# Altium PCB PCB1.PcbDoc
Units mil, origin at the board's own origin, x right, y up, seen from the top; angles counter-clockwise.
Board outline 970 x 870 mil, 2 copper layers (Top Layer, Bottom Layer); 11 components, 8 nets, 40 pads, 7 vias.
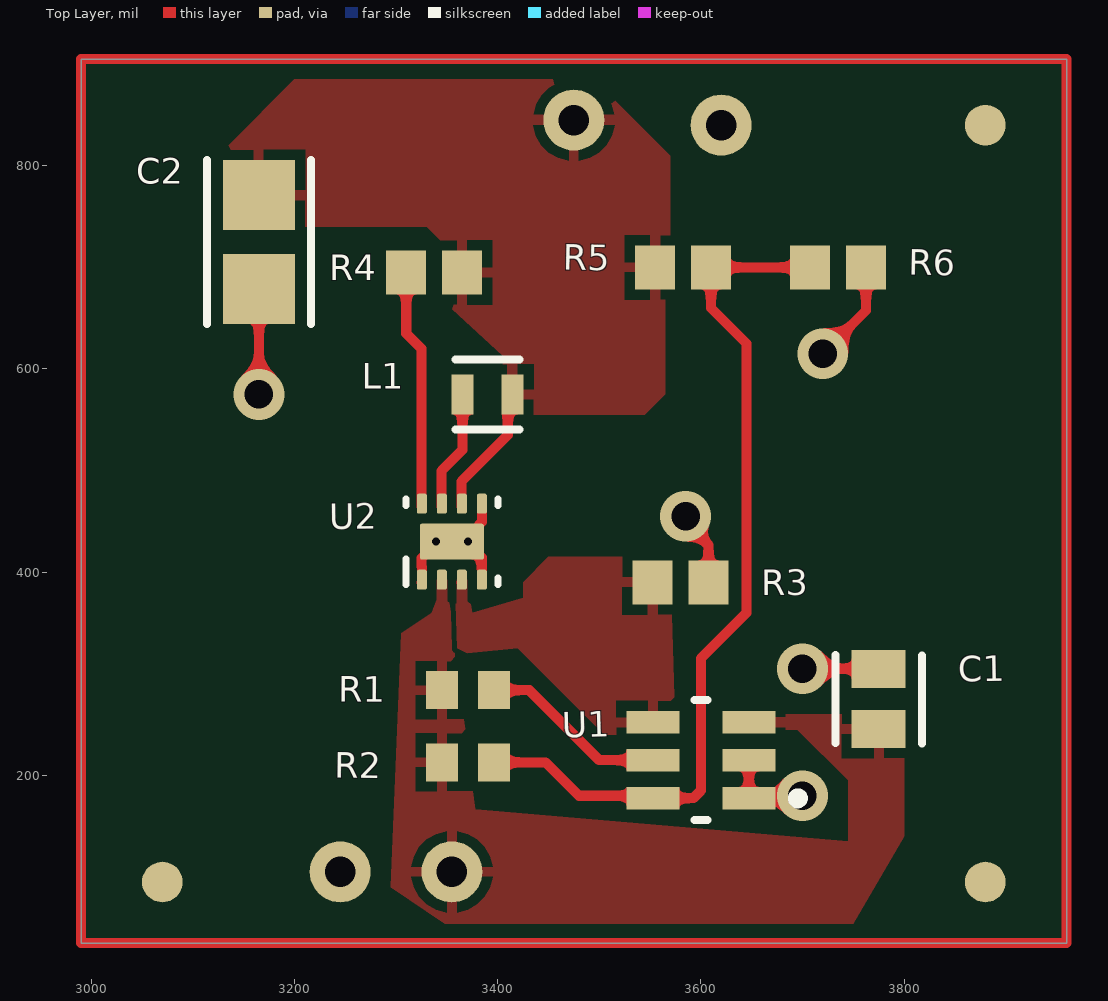
[diagram p0: Top Layer view]
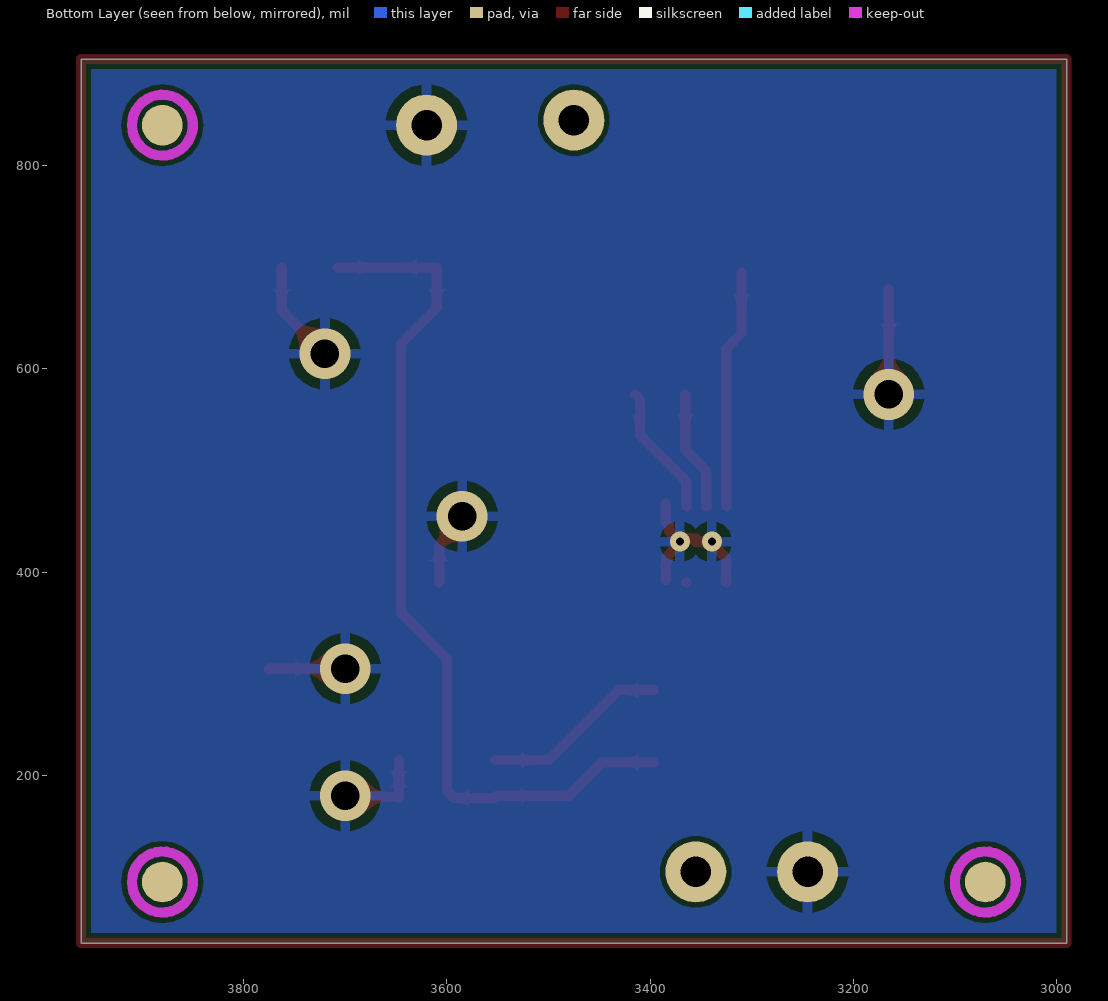
[diagram p1: Bottom Layer view, seen from below]
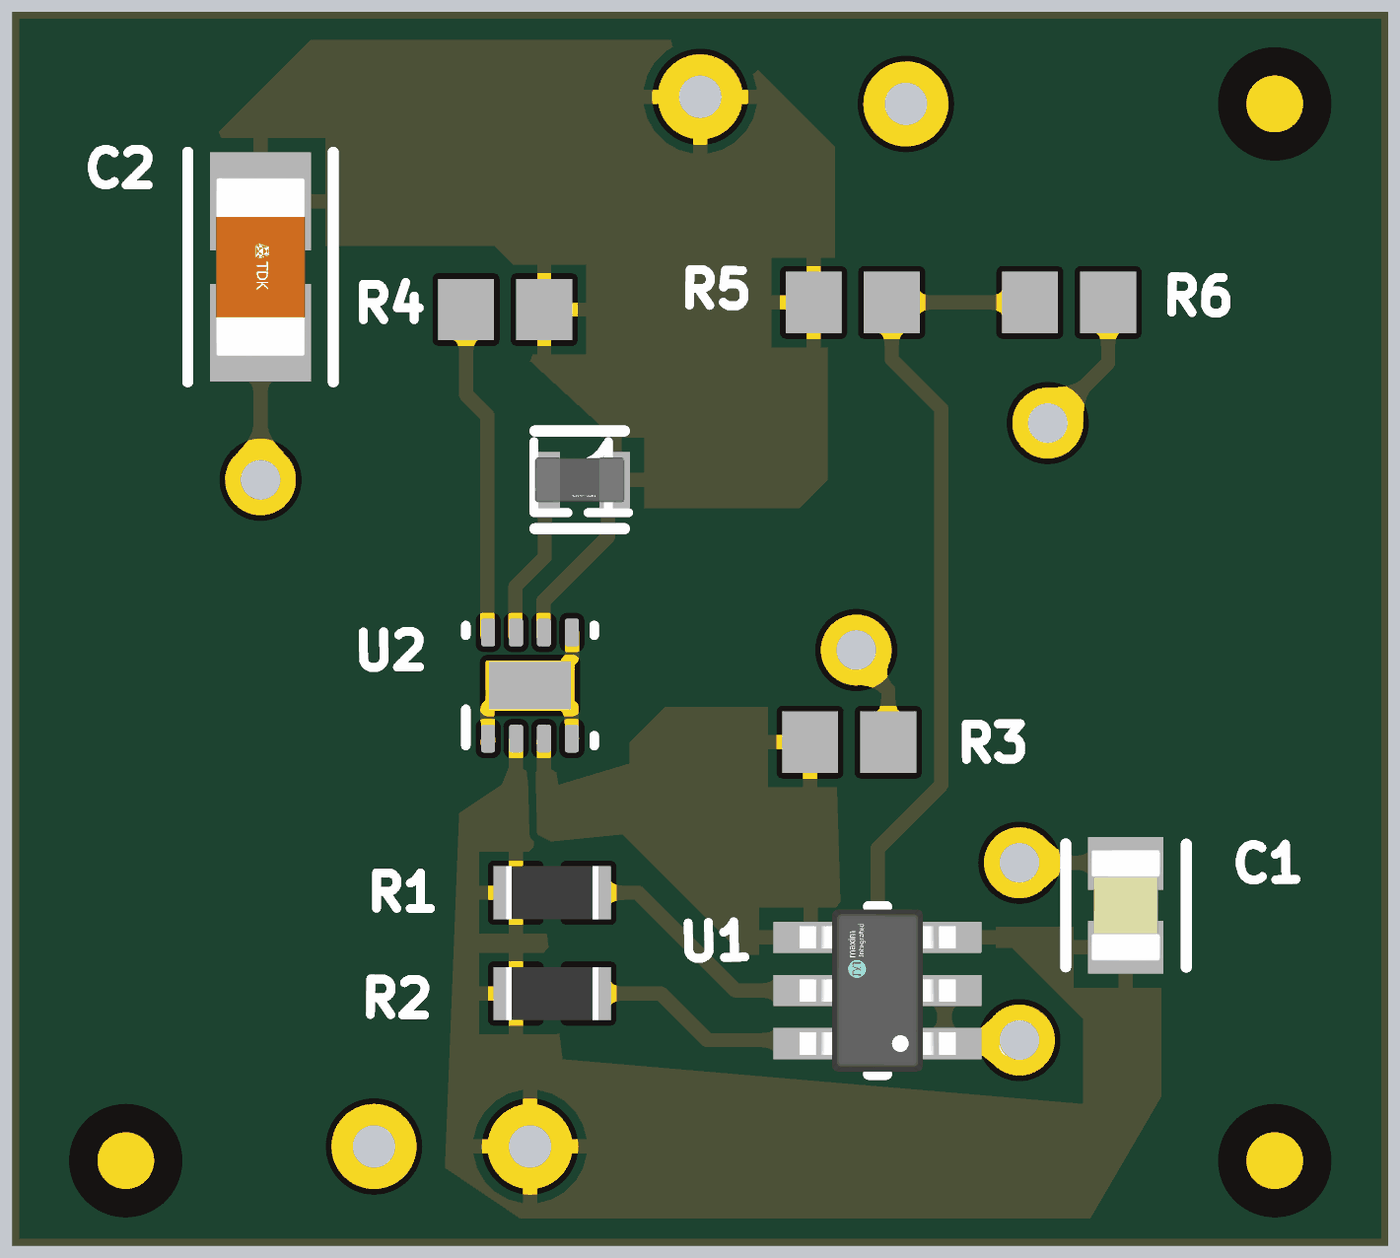
[diagram p2: 3D render of the assembled board from above, using the file's embedded part models]

## Layer stack, top to bottom
Top Solder: solder mask 0.4, Solder Resist, Dk 3.5
Top Layer: signal copper 1.4
Dielectric 1: dielectric 12.6, FR-4, Dk 4.8
Bottom Layer: signal copper 1.4
Bottom Solder: solder mask 0.4, Solder Resist, Dk 3.5

## Board outline
2990,35 2990,905 3960,905 3960,35

## Design rules (kind name [scope] priority, off if disabled: settings)
BoardOutlineClearance [All] p1: gap=10 ignorepadtopadclearanceinfootprint=FALSE except(0: Arc-SplitContinuation Track-SplitContinuation SMDPad-SplitContinuation THPad-SplitContinuation Via-SplitContinuation Fill-SplitContinuation Poly-SplitContinuation Region-SplitContinuation Text-SplitContinuation)
Clearance [All] p1: gap=5 ignorepadtopadclearanceinfootprint=FALSE except(0: Arc-Hole Track-Hole SMDPad-Hole THPad-Hole Via-Hole Fill-Hole Poly-Hole Region-Hole Text-Hole)
PolygonConnect [All] p1: connectstyle=Relief reliefconductorwidth=10 reliefentries=4 polygonreliefangle="90 Angle" airgapwidth=10
RoutingVias [All] p1: holewidth=28 width=50 viastyle="Through Hole" minholewidth=5 minwidth=5 maxholewidth=28 maxwidth=50
SolderMaskExpansion [All] p1: expansion=4 istentingtop=FALSE
Width [All] p1: maxlimit=10 minlimit=10 preferedwidth=10
30 further rules are at their usual default settings.

## Components (designator, comment, footprint, x,y, rotation, side; value= is the part's Value field where it differs from the comment)
C1 "C0805C106K8PACTU" FP-C0805C-DG-MFG 3775,275 r90 top value=10uF
C2 "C3216X5R1V226M160AC" FP-C3216-160-0_2-IPC_B 3165,725 r270 top
L1 "CBMF1608T2R2M" FP-CBMF1608-MFG 3390,575 r0 top
R1 "CRCW060310K0FKEA" RESC1609X50X30NL8T20 3370.59,283.88 r180 top
R2 "CRCW060310K0FKEA" RESC1609X50X30NL8T20 3370.59,212.84 r180 top
R3 "ERA3AEB104V" RESC1608X55X30ML20T20 3580,390 r180 top
R4 "ERA3AEB104V" RESC1608X55X30ML20T20 3337.44,695 r0 top
R5 "ERA3AEB104V" RESC1608X55X30ML20T20 3582.44,700 r180 top
R6 "ERA3AEB104V" RESC1608X55X30ML20T20 3735,700 r180 top
U1 "MAX16150AUT+T" FP-U6-1-MFG 3600,215 r180 top
U2 "TPS62162DSGR" DSG0008A_V 3355,430 r90 top

## Footprints (in the part's own frame and the unit in brackets; to place one, negate y for a bottom-side part, rotate by r counter-clockwise, add the part's x,y. Pads: shape width x height; smd on the part's side, far side on the other; paste and mask are expansions set on the pad)
DSG0008A_V [mm] "SON, 8-Leads, Body 2x2mm, Pitch 0.5mm, Thermal Pad 1.6x0.9mm, TI Recommended"
  rrect40% 0.5x0.25 smd: 1(-0.95,0.75) 2(-0.95,0.25) 3(-0.95,-0.25) 4(-0.95,-0.75) 5(0.95,-0.75) 6(0.95,-0.25) 7(0.95,0.25) 8(0.95,0.75)
  rrect11% 0.9x1.6 smd paste-0.45: 9(0,0)
  silkscreen extent -1.07,-1.15 1.07,1.15, body extent -1.05,-1.05 1.05,1.05, height 0.8
FP-C0805C-DG-MFG [mm]
  rect 0.95x1.35 smd paste+0 mask+0: 1(-0.75,0) 2(0.75,0)
  silkscreen extent -1.11,-1.08 1.1,1.07, body extent -1.4,-0.85 1.4,0.85, height 0.25
FP-C3216-160-0_2-IPC_B [mil]
  rect 69.05x71.11 smd paste+0 mask+0: 1(-46.3,0) 2(46.3,0)
  silkscreen extent -81,-51 81,51, body extent -91,-45 91,45, height 10
FP-CBMF1608-MFG [mm]
  rect 0.55x1 smd paste+0 mask+0: 1(-0.625,0) 2(0.625,0)
  silkscreen extent -0.8,-0.87 0.8,0.87, body extent -1,-0.6 1,0.6, height 0.25
FP-U6-1-MFG [mm]
  rect 1.33x0.56 smd paste+0 mask+0: 1(-1.2,0.95) 2(-1.2,0) 3(-1.2,-0.95) 4(1.2,-0.95) 5(1.2,0) 6(1.2,0.95)
  silkscreen extent -2.55,-1.5 0.16,1.5, body extent -1.96,-1.73 1.96,1.73, height 0.25
RESC1608X55X30ML20T20 [mm] "Chip Resistor, 2-Leads, Body 1.60x0.80mm, IPC Low Density"
  rect 1x1.1 smd: 1(-0.7,0) 2(0.7,0)
  body extent -0.9,-0.5 0.9,0.5, height 0.55
RESC1609X50X30NL8T20 [mm] "Chip Resistor, 2-Leads, Body 1.65x0.95mm, IPC Medium Density"
  rect 0.8x0.95 smd: 1(-0.65,0) 2(0.65,0)
  body extent -0.82,-0.48 0.82,0.48, height 0.5

## Part data
C1: library part CMP-2007-03243-2, "CAP CER 10UF 10V X5R 0805", 3DS Part Number=220-00001, Capacitance=10uF, Manufacturer=Kemet, Package=C0805C-DG, Temperature="-55°C to +85°C", Temperature Characteristic=X5R, Temperature Coefficient=15%, Temperature Range High=+85°C, Temperature Range Low=-55°C, Tolerance=10%, Voltage=10V, Automotive=No, Category=Cap, ComponentLink2Description=Datasheet, ComponentLink2URL=https://content.kemet.com/datasheets/KEM_C1006_X5R_SMD.pdf, Device Class L1="Passive Components", Device Class L2=Capacitors, Device Class L3="Ceramic Capacitors", Digikey Description="CAP CER 10UF 10V X5R 0805", Height=1.4mm, Ipc Land Pattern Name=CAPC200125X125, Lead Free=Yes, Manufacturer Part Number=C0805C106K8PACTU, Material=Ceramic, Mouser Description="CAP CER 10UF 10V X5R 0805", Octopart=https://octopart.com/c0805c106k8pactu-kemet-98697, RoHS=TRUE, Voltage Rating=10V
C2: library part CMP-2000-05398-2, "Multilayer Ceramic Capacitors 22uF ±20% 35V X5R SMD 1206", Capacitance=22uF, Case Code (Imperial)=1206, Case Code (Metric)=3216, Dielectric=X5R, Dielectric Material=Ceramic, Max Operating Temperature=85°C, Min Operating Temperature=-55°C, Package Quantity=2000, Tolerance=20%, Voltage=35V, Case/Package=1206, Construction=Flat, Depth=1.6mm, Height=1.6mm, Lead Free="Lead Free", Length=3.2mm, Mount="Surface Mount", Packaging="Tape and Reel", Radiation Hardening=No, REACH SVHC="No SVHC", Resistor Type=Ceramic, RoHS Compliant=Yes, Series=C, Termination=SMD/SMT, Thickness=1.6mm, Voltage Rating=35V, Voltage Rating (DC)=35V, Weight=0.000571oz, Width=0.063inch
L1: library part CMP-14484-000379-1, "SMD Inductors 2.2uH ±20% 0.56A 0.221Ω 0603", Case Code (Imperial)=0603, Case Code (Metric)=1608, Current Rating=560mA, DC Resistance (DCR)=221mR, Inductance=2.2uH, Inductance Tolerance=20%, Max Operating Temperature=105°C, Min Operating Temperature=-40°C, Package Quantity=1, Resistor Type=Wirewound, Saturation Current=190mA, Self Resonant Frequency=80MHz, Test Frequency=7.96MHz, Case/Package=0603, Core Material=Ferrite, DC Current=560mA, Depth=1mm, Halogen Free="Halogen Free", Height=0.8mm, Height - Seated (Max)=0.039inch, Lead Free="Lead Free", Length=1.6mm, Max DC Current=560mA, Military Standard=Not, Mount="Surface Mount", Packaging="Tape and Reel", Radiation Hardening=No, RoHS Compliant=Yes, Series=CBMF, Shielding=Unshielded, Termination=SMD/SMT, Tolerance=20%, Width=0.8mm
R1 R2: library part CMP-1666-00005-4, "Chip Resistor, 10 KOhm, +/- 1%, 100 mW, -55 to 155 degC, 0603 (1608 Metric), RoHS, Tape and Reel", Manufacturer="Vishay Semiconductor", Max Operating Temperature="155 degC", Min Operating Temperature="-55 degC", Package Quantity=5000, Voltage Rating="75 V", ComponentLink1Description="Manufacturer URL", ComponentLink1URL=http://www.vishay.com/, ComponentLink2Description=Datasheet, ComponentLink2URL=https://datasheet.ciiva.com/11809/0900766b80d98afc-11809037.pdf, DatasheetVersion=06/2012, Height="0.45 mm", Length="1.55 mm", Mounting Technology="Surface Mount", PackageDescription="2-Pin Surface Mount Device, Body 1.575 x 0.85 mm", PackageReference=0603, Packaging="Tape and Reel", REACH SVHC=Unknown, RoHSCompliant=true
R3 R4 R5 R6: library part CMP-2000-00875-1, Manufacturer=Panasonic, Part Number=ERA3AEB104V
U1: library part CMP-05723-001129-1, "IC SUPERVISOR 1 CHANNEL SOT23-6"
U2: library part CMP-0323-00316-3, "Buck Step Down Regulator with 3 to 17 V Input and 3.3 V Output, -40 to 85 degC, 8-Pin WSON (DSG), Green (RoHS & no Sb/Br)", Manufacturer="Texas Instruments", Rating=Catalog, Switch Current Limit(Typ)(A)=1.8, Code_JEDEC=MO-229, ComponentLink1Description=Datasheet, ComponentLink1URL=http://www.ti.com/general/docs/lit/getliterature.tsp?genericPartNumber=TPS62162&fileType=pdf, ComponentLink2Description="Package Specification", ComponentLink2URL=http://www.ti.com/litv/pdf/mpds308a, ComponentLink3Description="URL Link1", ComponentLink3URL="Samples URL:http://www.ti.com/product/tps62162#samples", DatasheetVersion=SLVSAM2A, Duty Cycle(Max)(%)=100, Eco-Plan="Green (RoHS & no Sb/Br)", Iout(Max)(A)=1, Iq(Typ)(mA)=0.017, Mounting Technology="Surface Mount", PackageDescription="8-Pin Plastic Small Outline No-Lead, 2 x 2 x 0.8 mm Body, 0.5 mm Pitch, Exposed Pad", PackageReference=DSG0008A, PackageVersion="revB, Oct-2010", PartNumber=TPS62162DSGR, Preset Vout(V)=3.3, Regulated Outputs(#)=1, SubFamily="Step-Down Regulator", Synchronous Rectification=TRUE, Topology=Buck, Vin(Max)(V)=17, Vin(Min)(V)=3, Vout(Max)(V)=3.3, Vout(Min)(V)=3.3

## Free pads (board coordinates)
  round 40 all layers, no hole mask+20: 0(3070,95) 0(3880,95) 0(3880,840)
  round 60 hole 30: 3(3475,845) 4(3620,840) 5(3355,105) 6(3245,105)

## Via types
v1: diameter 50, hole 28, Top Layer to Bottom Layer, 5 vias
v2: diameter 19.68, hole 7.87, Top Layer to Bottom Layer, 2 vias

## Nets (pads, with @x,y where several pads share a name; then routed paths per layer and width w, separated by ;. In a path a pad name is that pad's centre, name@x,y a point inside that pad or via, vN(x,y) a via of type N, cw(c..) or ccw(c..) an arc to the next point about the centre after c; other vN are vias at no path point)
+3V3_Dig: C2.1 L1.2 pad.3 R4.2 R5.2 U2.6 | length 131
  Top Layer w10: U2.6@3364.37,464.8 3364.37,489.37 3410,535 3410,570.39 L1.2
+3V3_EN: R3.2 U1.4 U2.3 | length 0.1
  Top Layer w10: U2.3@3364.29,389.92 U2.3@3364.37,390
GND: C1.2 C2.2 pad.4 pad.6 R3.1 R6.1 U1.1 U1.2 U2.1 U2.4 U2.5 U2.9 | length 610.9
  Top Layer w10: v1(3165,575) C2.2 ; U2.1@3325,390 3325.47,390.47 U2.1 3325.39,392.68 3325.39,405.1 3325,405.5 3325,413.78 3339.25,428.03 v2(3339.25,430) U2.9 ; U2.9@3354.55,432.87 U2.9@3369.92,435.28 ; U2.4 3384.45,392.68 3384.45,414.33 3370.75,428.03 v2(3370.75,430) 3381.5,440.75 3381.5,446.5 3384.61,449.61 3384.61,467.32 U2.5 ; v1(3585,455) 3585,449.21 3607.56,426.65 R3.1 ; U1.2 U1.1 3648.44,178.8 3698.8,178.8 v1(3700,180) ; v1(3700,305) 3774.53,305 C1.2 ; v1(3720,615) 3762.56,657.56 R6.1
NetL1_1: L1.1 U2.7 | length 118.8
  Top Layer w10: U2.7@3344.69,464.8 3344.69,499.68 3365.39,520.39 L1.1
NetR1_1: R1.1 U1.5 | length 185.1
  Top Layer w10: R1.1 3431.12,283.88 3500,215 U1.5
NetR4_1: R4.1 U2.8 | length 236.5
  Top Layer w10: R4.1 3310,694.88 3310,635 3325,620 U2.8@3325,464.8
V_IN: C1.1 pad.5 R1.2 R2.2 U1.3 U2.2
Vmon1: R2.1 R5.1 R6.2 U1.6 | length 867.1
  Top Layer w10: R2.1 3447.16,212.84 3480,180 3550.35,180 U1.6 3592.6,177.6 3600,185 3600,315 3645,360 3645,625 3610,660 R5.1 R6.2
copper on no net: | length 3680
  Top Layer w10: 2990,35 3960,35 3960,905 2990,905 2990,35

## Polygon pours and split planes (outlines as drawn)
+3V3_EN on Top Layer "`" (solid, pour order 5): 3575,240 3569.7,415 3450,415 3425,390 3425,375 3375,360 3370.1,390 3358.37,390 3360,325 3370,320 3420,325 3505,240
V_IN on Top Layer "`" (solid, pour order 7): 3625,245 3695,245 3745,195 3745,135 3377.94,166.46 3349.33,395.47 3335,360 3305,340 3295,90 3348.11,54.2 3750,54.2 3800,140 3800,260 3625,260 3800,260 3625,260
+3V3_Dig on Top Layer "`" (solid, pour order 6): 3570,705 3565,700 3565,575 3545,555 3405,555 3405,612.92 3345,667.92 3345,725 3330,740 3130,740 3130,815 3200,885 3495,885 3570,810 3570,685 3565,680 3560,685 3560,690
GND on Bottom Layer "`" (solid, pour order 10): 2990,910 2990,40 3960,40 3960,910

## Keep-outs
Bottom Layer:
  circle w10: c3880,840 r30
  circle w10: c3880,95 r30
  circle w10: c3070,95 r30